# Altium PCB Cross-sectionCPU-sketch4-BatteryZigbeee.PcbDoc
Units mm, origin at the board's own origin, x right, y up, seen from the top; angles counter-clockwise.
Board outline 152.4 x 101.6 mm, 2 copper layers (Top Layer, Bottom Layer); 2 components, 0 nets, 0 pads, 0 vias.
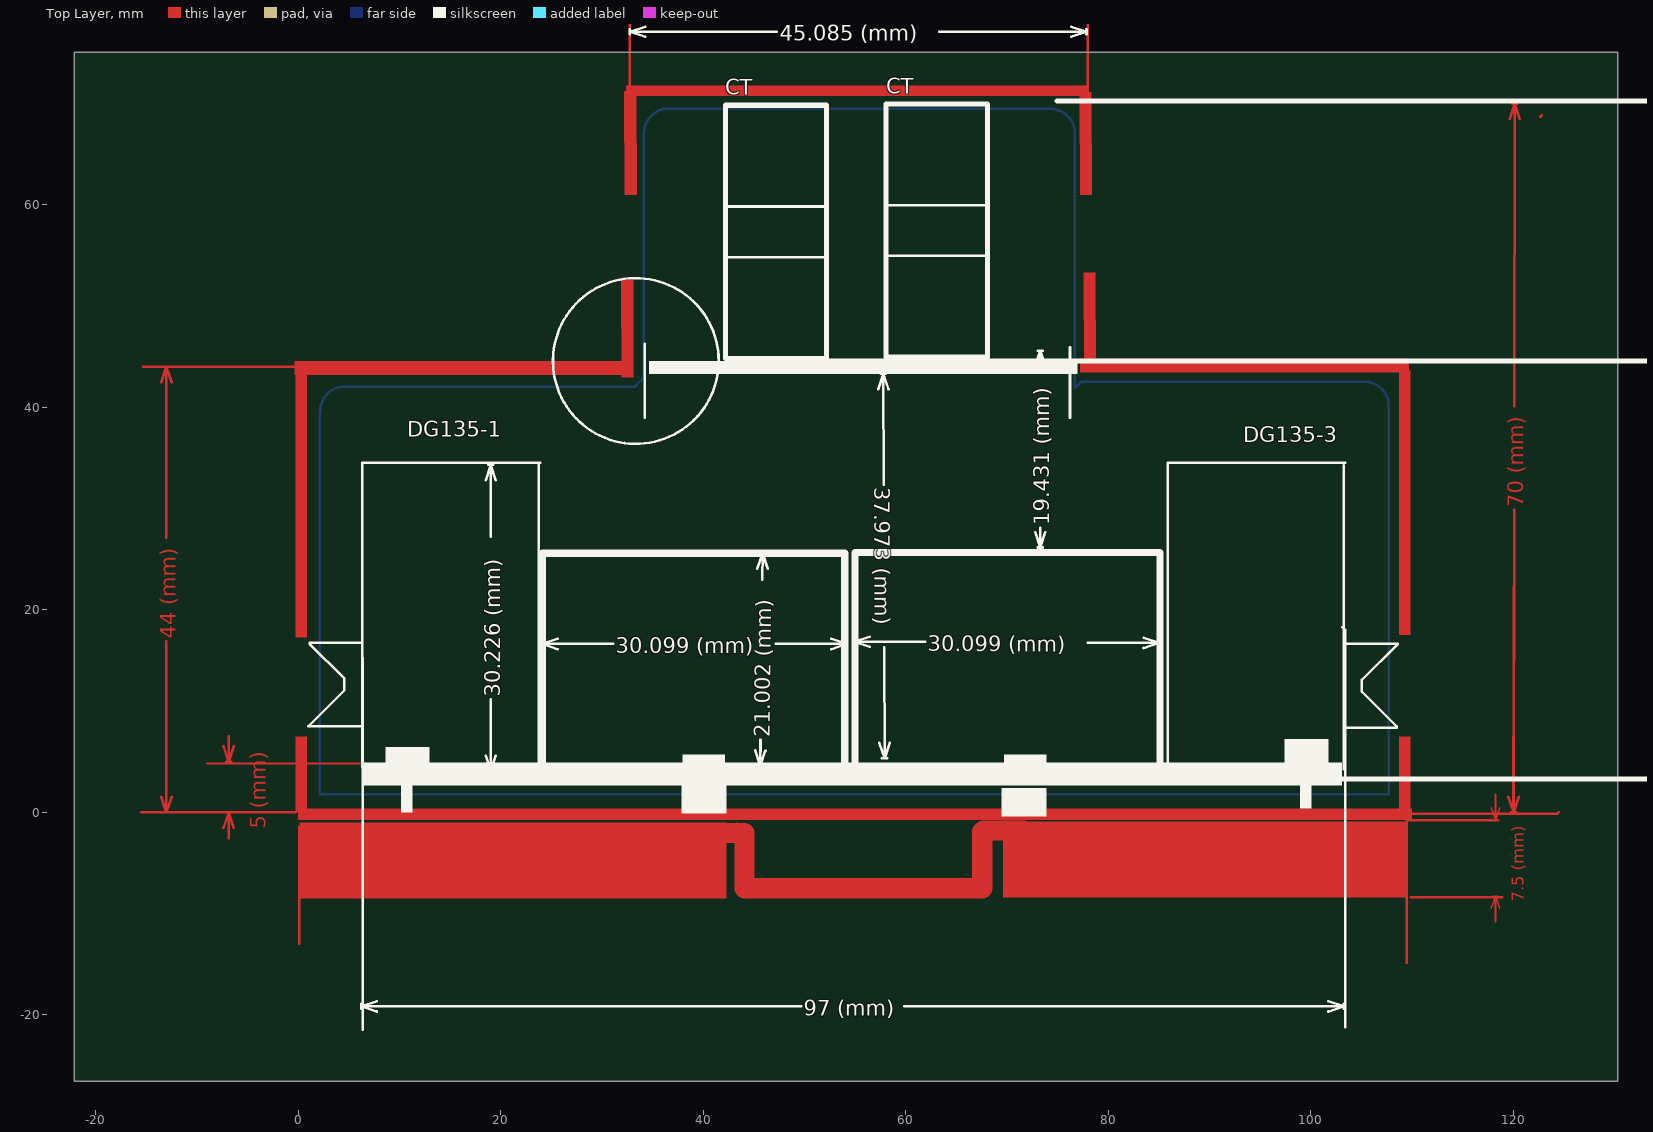
[diagram p0: Top Layer view]
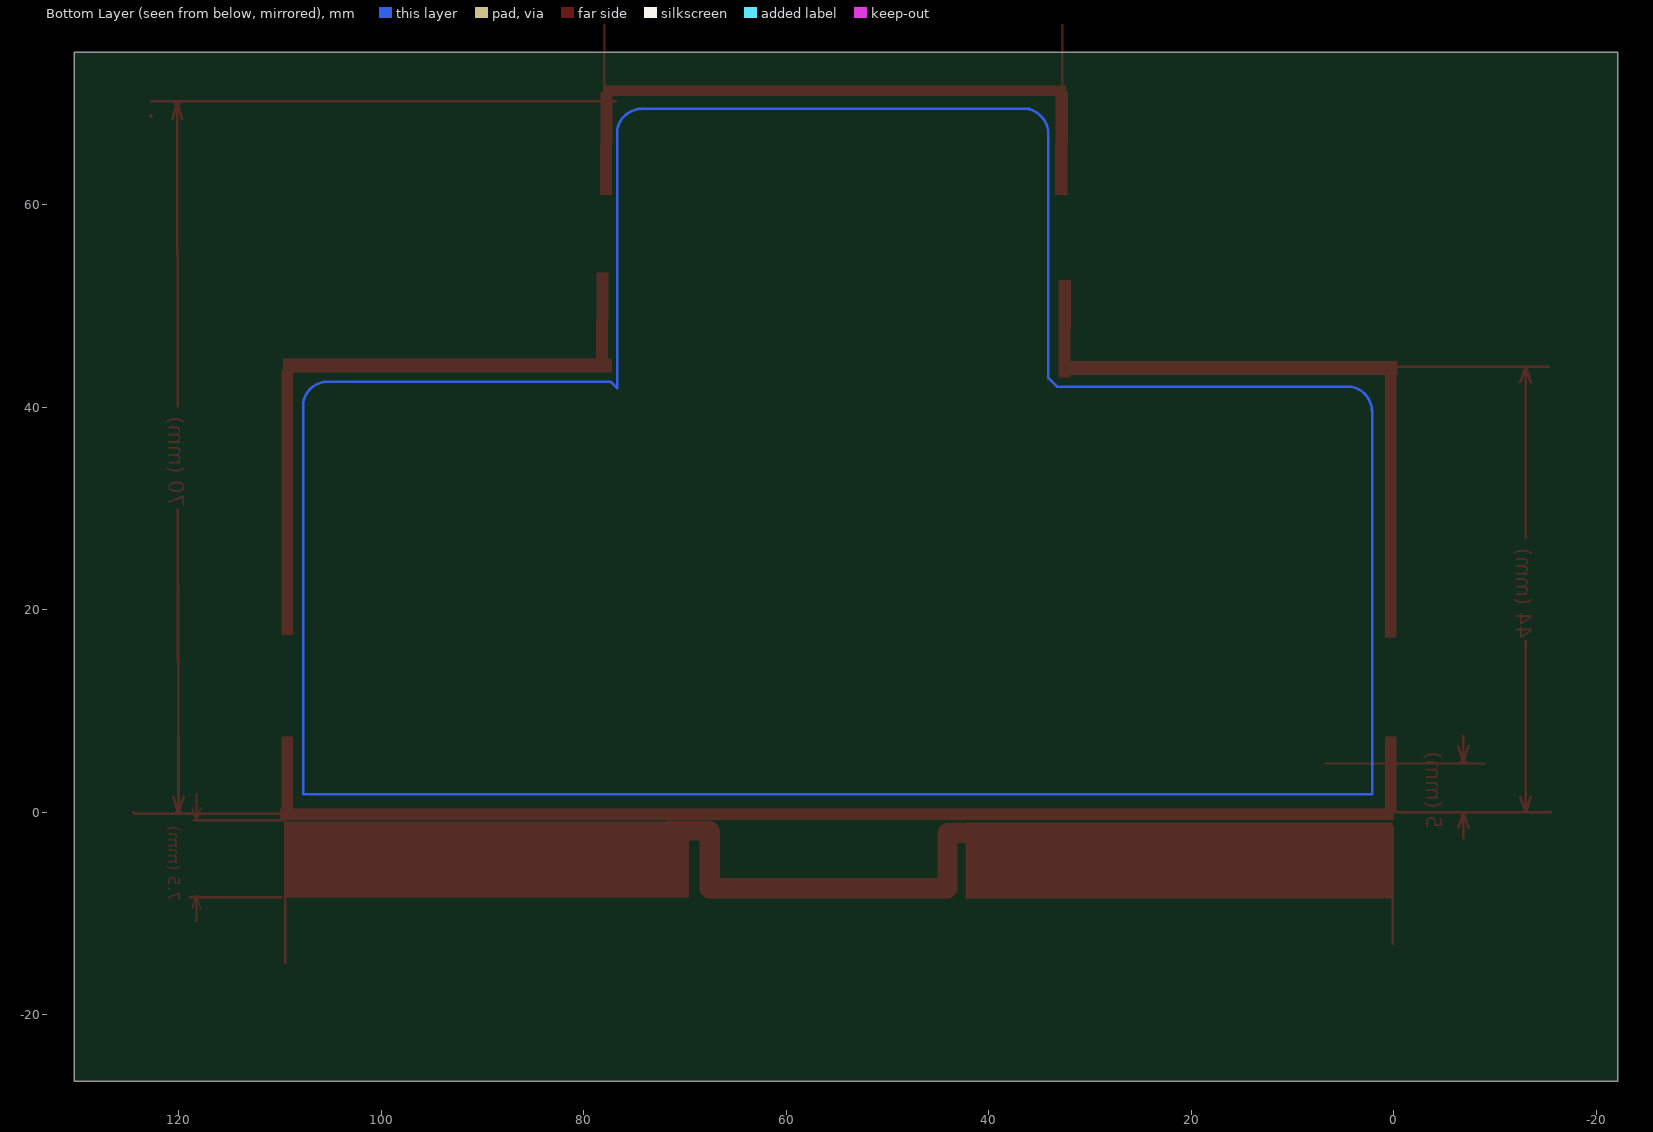
[diagram p1: Bottom Layer view, seen from below]

## Layer stack, top to bottom
Top Layer: signal copper 0.0356
Dielectric: dielectric 0.32, FR-4, Dk 4.8
Bottom Layer: signal copper 0.0356

## Board outline
-22.098,-26.543 130.302,-26.543 130.302,75.057 -22.098,75.057

## Design rules (kind name [scope] priority, off if disabled: settings)
Clearance [All] p1: gap=0.254
PolygonConnect [All] p1: connectstyle=Relief reliefconductorwidth=0.254 reliefentries=4 polygonreliefangle="90 Angle" airgapwidth=0.254
RoutingVias [All] p1: holewidth=0.711 width=1.27 viastyle="Through Hole" minholewidth=0.711 minwidth=1.27 maxholewidth=0.711 maxwidth=1.27
SolderMaskExpansion [All] p1: expansion=0.102
Width [All] p1: maxlimit=0.254 minlimit=0.254 preferedwidth=0.254
28 further rules are at their usual default settings.

## Components (designator, comment, footprint, x,y, rotation, side; value= is the part's Value field where it differs from the comment)
CT "Comment" CT-sketck1 68.072,44.958 r180 top
CT "Comment" CT-sketck1 52.197,44.831 r180 top

## Footprints (in the part's own frame and the unit in brackets; to place one, negate y for a bottom-side part, rotate by r counter-clockwise, add the part's x,y. Pads: shape width x height; smd on the part's side, far side on the other; paste and mask are expansions set on the pad)
CT-sketck1 [mm]
  silkscreen extent 0,-25 10,0

## Nets (pads, with @x,y where several pads share a name; then routed paths per layer and width w, separated by ;. In a path a pad name is that pad's centre, name@x,y a point inside that pad or via, vN(x,y) a via of type N, cw(c..) or ccw(c..) an arc to the next point about the centre after c; other vN are vias at no path point)
copper on no net: | length 2798
  Top Layer w0.154: 117.837,-9.462 118.237,-8.262 ; 117.837,0.438 118.237,-0.762 ; 117.983,-8.262 118.491,-8.262 ; 117.983,-0.762 118.491,-0.762 ; 118.237,-10.802 118.237,-8.262 ; 118.237,1.778 118.237,-0.762 ; 118.637,-9.462 118.237,-8.262 ; 118.637,0.438 118.237,-0.762
  Top Layer w0.2: -9.017,4.826 6.731,4.826
  Top Layer w0.254: -15.494,0 -0.254,0 ; -15.309,44 0.889,44 ; -13.508,1.524 -13,0 ; -13.508,42.476 -13,44 ; -13.254,0 -12.746,0 ; -13.254,44 -12.746,44 ; -13,16.896 -13,0 ; -13,27.104 -13,44 ; -12.492,1.524 -13,0 ; -12.492,42.476 -13,44 ; -7.366,-1.524 -6.858,0 ; -7.366,6.524 -6.858,5 ; -7.112,0 -6.604,0 ; -7.112,5 -6.604,5 ; -6.858,-2.54 -6.858,0 ; -6.858,7.54 -6.858,5 ; -6.35,-1.524 -6.858,0 ; -6.35,6.524 -6.858,5 ; 0.127,-12.954 0.127,-1.397 ; 32.766,68.707 32.766,80.264 ; 43.307,-1.143 44.069,-1.905 ; 76.835,70.231 122.682,70.231 ; 77.978,68.707 77.978,79.248 ; 108.585,-0.127 124.333,-0.127 124.46,0 ; 109.474,-14.859 109.474,0 ; 109.492,-0.762 118.509,-0.762 ; 109.873,-8.382 118.89,-8.382 ; 119.51,1.525 120.015,0 ; 119.631,68.477 120.142,70 ; 119.761,0 120.269,0 ; 119.888,70 120.396,70 ; 120.069,29.896 120.015,0 ; 120.088,40.104 120.142,70 ; 120.526,1.523 120.015,0 ; 120.647,68.475 120.142,70 ; 122.682,68.707 122.809,68.834 ; 857.12,252.127 ccw(c656.701,250.952) 857.123,250.952 ; 246.166,37.973 ccw(c200.406,37.973) 246.166,37.973
  Top Layer w2: 39.243,-2.032 44.069,-2.032 44.069,-7.493 67.513,-7.493 ; 67.564,-7.493 67.564,-1.905 ; 67.691,-1.778 71.628,-1.778
  Top Layer w5: 681.228,274.32 681.228,231.902 845.947,231.902 845.947,269.875 909.701,269.875 ; 920.496,270.51 983.615,270.51 982.472,269.367 982.472,232.283 1092.2,232.283 ; 1094.74,234.061 1094.74,269.621
  Bottom Layer w0.254: 2.159,39.497 cw(c4.674,39.561) 4.23,42.038 ; 2.159,39.751 2.159,1.778 107.696,1.778 107.696,40.513 ; 4.23,42.037 10.223,42.037 15.208,42.037 20.606,42.037 25.59,42.037 33.274,42.037 34.124,42.887 34.124,66.928 cw(c36.639,66.992) 36.195,69.469 ; 35.941,69.469 74.676,69.469 ; 74.168,69.469 cw(c74.232,66.954) 76.709,67.398 ; 76.708,67.398 76.708,41.91 77.343,42.545 105.664,42.545 ; 105.156,42.545 cw(c105.22,40.03) 107.697,40.474

## Polygon pours and split planes (outlines as drawn)
no net on Mechanical 1 "Top Layer-No Net" (hatched 90Degree grid 0.503 track 0.227): 292.989,72.263 366.395,72.263 366.395,74.848 365.695,75.529 365.134,76.073 293.269,76.073 293.269,73.352 292.989,73.079
no net on Mechanical 1 "Top Layer-No Net" (hatched 90Degree grid 0.503 track 0.227): 363.093,77.851 363.093,4.445 365.678,4.445 366.359,5.145 366.903,5.706 366.903,77.571 364.182,77.571 363.909,77.851
no net on Mechanical 1 "Top Layer-No Net" (hatched 90Degree grid 0.503 track 0.227): 208.28,72.263 281.686,72.263 281.686,74.848 280.986,75.529 280.425,76.073 208.56,76.073 208.56,73.352 208.28,73.079
no net on Mechanical 1 "Top Layer-No Net" (hatched 90Degree grid 0.503 track 0.227): 207.264,76.454 207.264,3.048 209.849,3.048 210.53,3.748 211.074,4.309 211.074,76.174 208.353,76.174 208.08,76.454
no net on Mechanical 1 "Top Layer-No Net" (hatched 90Degree grid 3 track 1): 579.628,101.346 565.023,101.346 565.023,389.128 565.531,389.636 568.452,386.715 580.644,386.715 580.644,102.362 579.628,101.346
no net on Mechanical 1 "Top Layer-No Net" (hatched 90Degree grid 3 track 1): 577.718,100.457 1211.702,100.457 1210.686,101.473 1210.686,118.11 578.607,118.11 575.686,121.031 576.702,120.015 576.702,101.473
no net on Mechanical 1 "Top Layer-No Net" (hatched 90Degree grid 3 track 1): 1207.77,102.362 1193.165,102.362 1193.165,390.144 1193.673,390.652 1196.594,387.731 1208.786,387.731 1208.786,103.378 1207.77,102.362
no net on Mechanical 1 "Top Layer-No Net" (hatched 90Degree grid 3 track 1): 570.86,378.968 1204.844,378.968 1203.828,379.984 1203.828,396.621 571.749,396.621 568.828,399.542 569.844,398.526 569.844,379.984
no net on Top Layer "Top Layer-No Net" (hatched 90Degree grid 3 track 1, pour order 19): 8.636,272.415 14.097,272.415 14.986,271.664 14.478,271.235 14.478,227.457 10.16,227.457 9.144,228.315 9.144,272.415
no net on Top Layer "Top Layer-No Net" (hatched 90Degree grid 3 track 1, pour order 22): 8.636,227.965 146.911,227.965 147.447,228.526 147.447,232.738 9.709,232.738 9.172,233.299 9.172,229.716
no net on Top Layer "Top Layer-No Net" (hatched 90Degree grid 3 track 1, pour order 18): 145.923,273.431 151.384,273.431 152.273,272.68 151.765,272.251 151.765,228.473 147.447,228.473 146.431,229.331 146.431,273.431
no net on Top Layer "Top Layer-No Net" (hatched 90Degree grid 3 track 1, pour order 21): 147.955,267.97 311.911,267.97 312.547,268.531 312.547,272.743 149.227,272.743 148.591,273.304 148.591,269.721
no net on Top Layer "Top Layer-No Net" (hatched 90Degree grid 3 track 1, pour order 17): 312.42,272.415 317.881,272.415 318.77,271.664 318.262,271.235 318.262,227.457 313.944,227.457 312.928,228.315 312.928,272.415
no net on Top Layer "Top Layer-No Net" (hatched 90Degree grid 3 track 1, pour order 20): 312.42,226.949 417.549,226.949 417.957,227.51 417.957,231.722 313.236,231.722 312.828,232.283 312.828,228.7
no net on Top Layer "Top Layer-No Net" (hatched 90Degree grid 3 track 1, pour order 16): 413.004,271.907 418.465,271.907 419.354,271.156 418.846,270.727 418.846,226.949 414.528,226.949 413.512,227.807 413.512,271.907

## Other copper
Top Layer:
  rectangle: 69.596,-8.389 109.347,-0.889
  rectangle: 0.127,-8.516 42.291,-1.016
  rectangle: 0,-0.762 110,0.381
  rectangle: -0.254,17.272 0.889,44
  rectangle: 108.712,17.526 109.855,43.619
  rectangle: -0.369,43.18 32.131,44.577
  rectangle: 77.216,43.434 109.716,44.831
  region: 33.097,52.574 31.894,52.569 31.939,42.956 33.142,42.961
  region: 78.75,53.342 77.547,53.337 77.591,43.938 78.794,43.943
  rectangle: 32.385,70.739 77.978,71.755
  rectangle: -0.254,0 0.889,7.493
  rectangle: 108.712,0 109.855,7.493
  region: 78.365,71.123 77.162,71.117 77.21,60.956 78.413,60.961
  region: 33.406,71.25 32.204,71.244 32.252,60.956 33.455,60.961
  rectangle: 215.011,-4.96 363.093,2.54
  text "70 (mm)" at 120.984,30.148 h1.52 r89.9
  text "44 (mm)" at -12.086,17.15 h1.52 r90
  text "5 (mm)" at -3.201,-1.588 h1.52 r90
  text "7.5 (mm)" at 121.036,-8.811 h1.2 r90

## Silkscreen, mask and mechanical layers (free items; w line width, h text height)
Top Overlay:
  drawing of 480 lines, arcs and shapes, not listed
  text "1.13mm" at 689.102,369.062 h4
  text "12.67mm" at 624.332,365.125 h4
  text "PS 12v 24W" at 1137.793,300.736 h4
  text "Zigbee zone" at 938.022,299.974 h4
  text "Zigbee zone" at 948.182,296.037 h4
  text "5mm" at 647.446,291.846 h4
  text "Batteries zone" at 57.404,276.733 h4
  text "40mm" at 1024.255,264.668 h4
  text "Zigbee zone" at 354.33,259.08 h4
  text "16mm" at 816.102,252.857 h4
  text "Fan zone" at 204.724,226.949 h4
  text "56.5mm" at 813.816,202.565 h4
  text "60mm" at 900.938,202.565 h4
  text "2.54mm" at 549.529,180.721 h4
  text "2.44mm" at 549.148,91.948 h4
  text "2.54mm" at 678.307,81.407 h4
  text "2.5mm" at 580.39,78.613 h4
  text "1.63mm" at 607.06,76.581 h4
  text "45.085 (mm)" at 47.539,76.175 h1.52
  text "153mm" at 869.696,72.136 h4
  text "30mm" at 353.314,72.009 h3
  text "25.73mm" at 1143.127,71.374 h4
  text "2.44mm" at 1214.12,69.469 h4
  text "11.51mm" at 684.403,68.707 h4
  text "8.76mm" at 628.015,66.802 h4
  text "Zigbee Module MFR 24J40MA" at 359.918,55.118 h3
  text "CT-board" at 260.35,50.292 h3
  text "205.12mm" at 868.934,47.498 h4
  text "12V/24W PS" at 344.043,39.624 h3
  text "DG135-1" at 10.795,37.084 h1.52
  text "DG135-3" at 93.345,36.576 h1.52
  text "CPU-board" at 215.646,36.068 h3
  text "37.973 (mm)" at 56.908,32.087 h1.52 r270.19
  text "210mm" at 869.696,28.956 h4
  text "19.431 (mm)" at 74.193,28.361 h1.52 r90
  text "32mm" at 374.777,20.701 h3
  text "30.099 (mm)" at 62.18,15.916 h1.52 r359.76
  text "30.099 (mm)" at 31.369,15.723 h1.52
  text "30.226 (mm)" at 19.939,11.43 h1.52 r90
  text "Relay-board" at 274.447,9.271 h3
  text "21.002 (mm)" at 46.573,7.437 h1.52 r89.31
  text "152.5mm" at 286.131,-8.89 h3
  text "25.73mm" at 346.202,-13.843 h3
  text "97 (mm)" at 49.911,-20.066 h1.52
  text "210mm" at 284.353,-30.48 h3
Top Paste:
  circle w5: c1065.709,323.215 r14.299
  circle w5: c704.775,328.295 r14.299
  circle w5: c749.987,328.295 r14.299
  circle w5: c796.723,327.914 r14.299
  rectangle: 587.629,336.296 591.947,346.329
  rectangle: 587.629,348.615 591.947,358.648
  rectangle: 586.232,133.985 591.947,144.018
  rectangle: 587.121,245.872 591.439,255.905
  rectangle: 587.629,262.001 591.947,272.034
  rectangle: 585.216,288.671 592.455,313.436
  rectangle: 584.327,187.833 591.947,232.029
  rectangle: 662.305,133.35 676.529,143.764
  rectangle: 662.305,265.43 676.529,275.844
  rectangle: 600.837,143.764 662.305,156.083
  rectangle: 601.853,305.435 662.813,361.061
  rectangle: 601.345,273.05 634.746,305.435
  rectangle: 601.345,254.127 662.813,266.446
  rectangle: 600.71,180.594 616.839,242.57
  rectangle: 344.678,240.157 378.968,244.602
  lines w0.3: 601.853,357.251 601.345,356.743 601.345,310.134 639.445,310.134 640.842,311.531 640.842,324.866 641.858,325.882 650.875,325.882 651.891,326.898 651.891,342.011 650.875,343.027 640.969,343.027 640.842,342.9 640.842,355.854 639.445,357.251 604.266,357.251 ; 601.853,361.061 600.964,360.172 600.964,306.832 658.495,306.832 660.4,308.737 660.4,361.569 660.908,362.077 601.853,362.077
  lines w5: 673.227,330.962 673.227,290.957 674.243,289.941 735.203,289.941 735.203,326.771 ; 673.459,329.161 cw(c704.3,329.161) 735.076,327.152 ; 708.152,139.827 708.152,245.364 799.973,245.364 ; 709.168,136.779 802.005,136.779 ; 710.184,217.932 800.862,217.932 ; 714.1,157.393 ccw(c724.133,154.472) 734.06,157.734 ; 715.137,159.766 734.06,159.766 735.076,158.75 ; 718.439,330.962 718.439,290.957 719.455,289.941 780.415,289.941 780.415,326.771 ; 718.671,329.161 cw(c749.512,329.161) 780.288,327.152 ; 740.029,137.795 740.029,215.773 ; 744.58,156.885 ccw(c754.613,153.964) 764.641,156.899 ; 745.617,158.75 765.556,158.75 766.064,158.242 ; 765.175,330.581 765.175,290.576 766.191,289.56 827.151,289.56 827.151,326.39 ; 765.407,328.78 cw(c796.248,328.78) 827.024,326.771 ; 771.017,137.287 771.017,215.773 ; 776.986,159.258 795.02,159.258 795.528,158.75 ; 777.092,157.901 ccw(c787.125,154.98) 797.052,158.242 ; 801.497,138.557 801.497,243.078 ; 1006.475,133.731 1099.312,133.731 1100.328,134.747 ; 1008.126,136.779 1100.963,136.779 1101.979,137.795 ; 1008.507,139.065 1008.507,245.999 ; 1011.047,219.964 1097.915,219.964 ; 1012.063,245.364 1098.931,245.364 ; 1013.058,157.393 ccw(c1023.091,154.472) 1033.018,157.734 ; 1014.095,159.766 1033.018,159.766 1034.034,158.75 ; 1036.066,325.247 cw(c1066.907,325.247) 1097.683,323.238 ; 1036.066,327.279 1036.066,287.274 1037.082,286.258 1098.042,286.258 1098.042,320.294 ; 1038.987,137.795 1038.987,215.773 ; 1043.538,156.885 ccw(c1053.571,153.964) 1063.498,157.226 ; 1044.575,158.75 1064.514,158.75 1065.022,158.242 ; 1069.975,137.287 1069.975,215.773 ; 1075.944,159.258 1093.978,159.258 1094.486,158.75 ; 1076.05,157.901 ccw(c1086.083,154.98) 1096.01,158.242 ; 1100.455,141.732 1100.455,243.078
Mechanical 1:
  circle w0.254: c249.428,63.881 r2.797
  circle w0.254: c325.628,63.881 r2.797
  circle w0.254: c239.268,63.627 r2.797
  circle w0.254: c357.346,31.877 r2.318
  rectangle: 654.685,276.352 1101.217,288.671
  rectangle: 652.78,122.174 1106.424,134.493
  rectangle: 592.328,128.905 601.345,362.458
  rectangle: 219.202,49.657 226.314,56.261
  rectangle: 218.694,57.404 228.473,69.977
  rectangle: 336.55,5.461 338.328,55.372
  rectangle: 241.427,5.207 260.604,38.989
  rectangle: 261.112,5.715 280.289,38.989
  rectangle: 280.924,5.969 300.101,39.116
  rectangle: 300.482,6.223 319.659,39.116
  rectangle: 320.167,6.604 339.344,39.116
  rectangle: 348.742,9.779 360.553,13.462
  rectangle: 349.25,14.097 360.172,17.272
  rectangle: 353.695,18.161 360.172,28.448
  rectangle: 284.353,6.35 286.131,52.197
  rectangle: 231.775,2.667 233.553,10.033
  rectangle: 691.007,130.683 700.786,220.599
  rectangle: 1097.407,134.62 1107.186,224.536
  rectangle: 1082.802,128.651 1092.581,300.736
  rectangle: 678.815,122.301 688.594,294.386
  rectangle: 1112.647,124.841 1187.323,285.75
  lines w0.2: 64.135,88.011 74.549,88.011 ; 64.262,103.632 75.184,103.632 ; 67.564,87.884 67.564,103.632
  lines w0.254: 32.639,35.179 ccw(c35.687,98.552) 99.06,95.504 ; 38.354,25.654 38.862,27.178 ; 38.354,44.196 38.862,42.672 ; 38.608,27.178 39.116,27.178 ; 38.608,42.672 39.116,42.672 ; 38.862,24.638 38.862,27.178 ; 38.862,45.212 38.862,42.672 ; 39.37,25.654 38.862,27.178 ; 39.37,44.196 38.862,42.672 ; 74.548,107.569 74.55,108.077 ; 76.071,107.308 74.549,107.823 ; 76.075,108.324 74.549,107.823 ; 96.053,107.731 74.549,107.823 ; 112.1,107.661 133.604,107.569 ; 132.078,107.068 133.604,107.569 ; 132.082,108.084 133.604,107.569 ; 133.603,107.315 133.605,107.823 ; 232.279,63.624 cw(c239.605,63.712) 246.929,63.503 ; 242.439,63.878 cw(c249.765,63.966) 257.089,63.757 ; 318.639,63.878 cw(c325.965,63.966) 333.289,63.757 ; 353.441,104.394 cw(c317.436,60.008) 361.823,24.003
  lines w0.3: 232.283,48.387 232.283,63.246 ; 242.443,48.641 242.443,63.5 ; 246.929,48.047 246.929,63.502 ; 257.089,48.301 257.089,63.756 ; 318.643,48.641 318.643,63.5 ; 333.289,48.301 333.289,63.756 ; 564.515,159.893 578.358,159.893 ; 565.277,203.708 577.596,203.708 ; 565.277,208.026 565.658,207.645 ; 565.658,154.559 565.658,160.401 ; 565.658,203.581 565.912,203.835 ; 565.912,203.2 565.912,211.836 ; 574.802,159.893 574.802,203.2
  lines w0.7: 74.041,87.884 133.35,87.884 ; 74.422,88.265 74.422,103.759 133.731,103.759 133.731,88.265 ; 75.057,104.14 91.186,120.269 ; 91.567,120.777 108.077,137.287 167.132,137.287 150.749,120.904 ; 97.663,93.726 99.06,95.123 99.06,95.504 ; 99.187,95.377 99.187,95.123 100.33,93.98 ; 130.048,223.774 130.048,211.201 130.81,210.439 ; 130.81,223.012 137.795,223.012 144.907,215.9 ; 133.731,103.505 133.731,103.886 151.003,121.158 ; 133.985,87.757 134.366,87.757 163.957,117.348 164.084,117.348 166.878,120.142 166.878,137.033 ; 218.44,27.686 227.457,27.686 ; 218.44,30.353 227.457,30.353 ; 218.567,25.019 227.584,25.019 ; 218.567,33.147 227.584,33.147 ; 218.694,22.352 227.711,22.352 ; 334.582,122.745 361.315,149.479 ; 334.772,121.666 334.772,97.028 369.062,97.028 396.24,124.206 396.24,149.733 ; 335.28,122.428 367.538,122.428 ; 361.569,149.733 396.113,149.733 ; 368.554,97.282 368.427,97.155 368.427,121.539 367.538,122.428 ; 395.922,149.542 368.808,122.428 367.538,122.428 ; 565.658,160.02 565.658,203.581 ; 1107.186,123.952 1189.482,123.952 1188.847,124.587 1188.847,288.163 1188.085,288.925 ; 23.749,27.686 24.765,26.67 83.82,26.67 84.328,27.178 84.328,42.672 23.876,42.672 23.749,42.545 23.749,27.686
  lines w1: 912.495,96.901 912.495,144.907 933.45,165.862 933.45,187.833 ; 916.432,242.697 916.432,279.781 938.403,301.752 ; 938.403,302.641 938.403,329.565
  lines w2: 108.839,131.064 ccw(c74.231,188.405) 131.572,223.012
  text "Fan Dim 60x60x10" at 203.835,417.83 h3.52
  text "http://jp.made-in-china.com/co_judytien/product_60X60X10-mm-12V-DC-Axial-Fan-Mini-Axial-Fan_eeieuygsg.html" at 73.533,392.557 h7.52
  text "164mm" at 198.374,339.09 h3.52
  text "36mm" at 355.473,295.529 h3.52
  text "58mm" at 80.645,295.148 h3.52
  text "62mm" at 216.408,294.386 h3.52
  text "2mm" at 423.418,292.862 h3.52
  text "17.8mm" at -31.369,248.539 h3.52
  text "69mm" at 582.041,174.117 h3.52 r90
  text "12V/24W PS GAP" at 359.664,154.432 h3
  text "H=15.4mm" at 424.053,149.987 h3.52
  text "W=69mm" at 136.779,139.954 h3.52
  text "Fan's GAP" at 112.903,120.015 h3.52
  text "H=50mm" at 309.88,108.204 h3.52
  text "L=87mm" at 387.477,107.315 h3.52
  text "59.056 (mm)" at 96.303,106.815 h1.52 r359.75
  text "L=161mm" at 159.639,102.743 h3.52
  text "h=17.8mm" at 34.544,95.377 h4
  text "W=25mm" at 340.233,90.932 h3.52
  text "15.494 (mm)" at 42.519,27.282 h1.52 r90